# Altium PCB PCB_LC_FILTER.PcbDoc
Units mm, origin at the board's own origin, x right, y up, seen from the top; angles counter-clockwise.
Board outline 152.4 x 101.6 mm, 2 copper layers (Top Layer, Bottom Layer); 15 components, 3 nets, 46 pads, 0 vias.
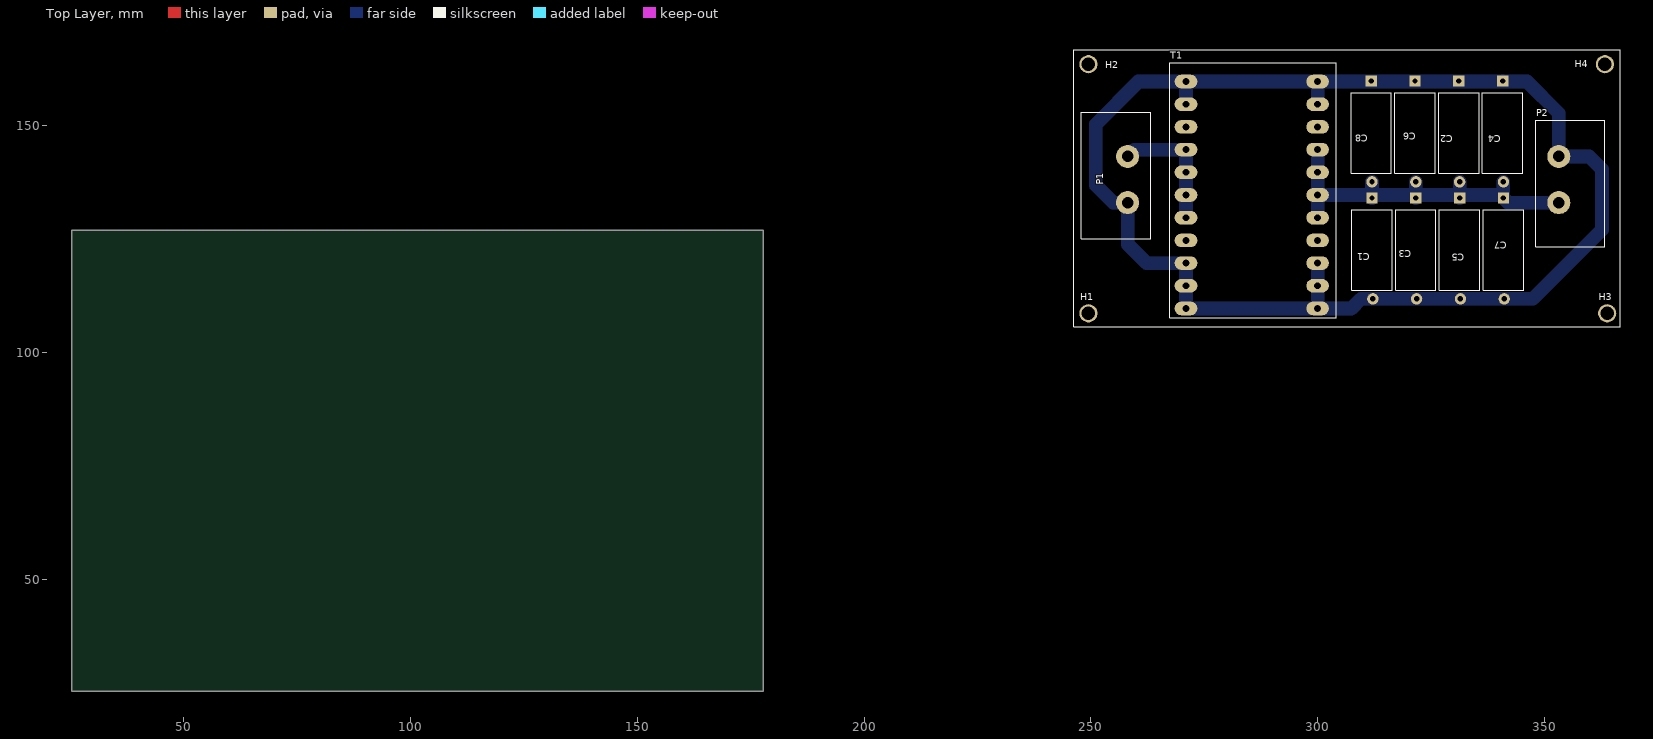
[diagram p0: Top Layer view]
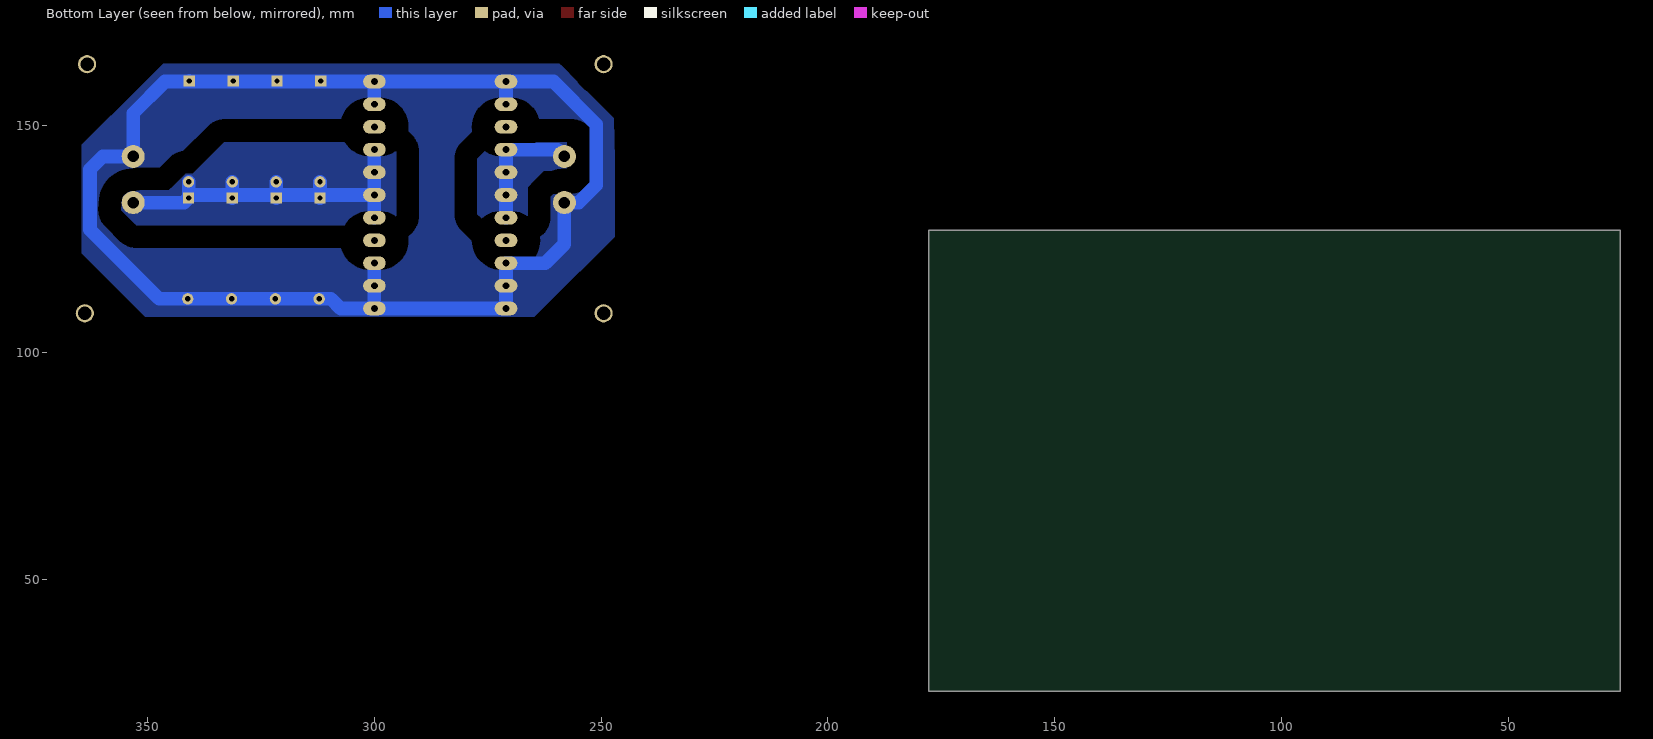
[diagram p1: Bottom Layer view, seen from below]

## Layer stack, top to bottom
Top Layer: signal copper 0.0356
Dielectric: dielectric 0.32, FR-4, Dk 4.8
Bottom Layer: signal copper 0.0356

## Board outline
25.4,25.4 177.8,25.4 177.8,127 25.4,127

## Design rules (kind name [scope] priority, off if disabled: settings)
Clearance 1234 [InNamedPolygon('GND_BOT1') Or  InNamedPolygon('GND_BOT2') Or  InNamedPolygon('GND_BOT3')] p1: gap=5 // 1234
Clearance [All] p2: gap=0.254
PolygonConnect 123 [All vs IsNamedPolygon('GND_BOT1') Or  IsNamedPolygon('GND_BOT2') Or  IsNamedPolygon('GND_BOT3')] p1: connectstyle=Direct reliefconductorwidth=0.254 reliefentries=4 polygonreliefangle="90 Angle" // 123
PolygonConnect [All] p2: connectstyle=Relief reliefconductorwidth=0.254 reliefentries=4 polygonreliefangle="90 Angle"
RoutingVias [All] p1: holewidth=0.711 width=1.27 viastyle="Through Hole" minholewidth=0.711 minwidth=1.27 maxholewidth=0.711 maxwidth=1.27
SilkscreenOverComponentPads [All] p1: minsilkscreentomaskgap=0.254
SolderMaskExpansion [All] p1: expansion=0.102
Width [All] p1: maxlimit=5 minlimit=0.254 preferedwidth=0.254
27 further rules are at their usual default settings.

## Components (designator, comment, footprint, x,y, rotation, side; value= is the part's Value field where it differs from the comment)
C1 "Cap" TU 326.058,123.325 r180 top
C2 "Cap" TU 345.186,149.098 r180 top
C3 "Cap" TU 335.71,123.325 r180 top
C4 "Cap" TU 354.838,149.098 r180 top
C5 "Cap" TU 345.362,123.325 r180 top
C6 "Cap" TU 335.534,149.098 r180 top
C7 "Cap" TU 355.014,123.325 r180 top
C8 "Cap" TU 325.882,149.098 r180 top
H1 "HOLE" HOLE 240.665,101.727 r0 top
H2 "HOLE" HOLE 240.665,156.591 r0 top
H3 "HOLE" HOLE 354.965,101.727 r0 top
H4 "HOLE" HOLE 354.457,156.591 r0 top
P1 "IN" CONNECTOR2 262.382,115.189 r90 top
P2 "OUT" CONNECTOR2 348.742,161.163 r270 top
T1 "transformer" PCBComponent_1 271.272,132.08 r0 top

## Footprints (in the part's own frame and the unit in brackets; to place one, negate y for a bottom-side part, rotate by r counter-clockwise, add the part's x,y. Pads: shape width x height; smd on the part's side, far side on the other; paste and mask are expansions set on the pad)
CONNECTOR2 [mil]
  round 200 hole 100: 1(1105,170) 2(705,170)
  silkscreen extent 390,-30 1490,570
HOLE [mm]
  round 4 hole 3: 1(8.763,6.985)
PCBComponent_1 [mm]
  oval 5x3 hole 1.499: 1(-0.342,27.688) 2(-0.342,22.688) 3(-0.342,17.688) 4(-0.342,12.688) 5(-0.342,7.688) 6(-0.342,2.688) 7(-0.342,-2.312) 8(-0.342,-7.312) 9(-0.342,-12.312) 10(-0.342,-17.312) 11(-0.342,-22.312) 12(28.658,-22.312) 13(28.658,-17.312) 14(28.658,-12.312) 15(28.658,-7.312) 16(28.658,-2.312) 17(28.658,2.688) 18(28.658,7.688) 19(28.658,12.688) 20(28.658,17.688) 21(28.658,22.688) 22(28.658,27.688)
  silkscreen extent -3.91,-24.36 32.75,31.78
TU [mm]
  rect 2.5x2.5 hole 1.2: 1(14.146,-10.787)
  round 2.5 hole 1.2: 2(13.97,11.43)
  silkscreen extent 9.7,-8.25 18.59,9.53

## Part data
C1 C2 C3 C4 C5 C6 C7 C8: "Capacitor"
H1 H2 H3 H4: library part Socket, "Socket"
P1 P2: library part "Header 2", "Header, 2-Pin"
T1: library part "Header 11X2A", "Header, 11-Pin, Dual row"

## Nets (pads, with @x,y where several pads share a name; then routed paths per layer and width w, separated by ;. In a path a pad name is that pad's centre, name@x,y a point inside that pad or via, vN(x,y) a via of type N, cw(c..) or ccw(c..) an arc to the next point about the centre after c; other vN are vias at no path point)
NetC1_1: C1.1 C2.2 C3.1 C4.2 C5.1 C6.2 C7.1 C8.2 P2.1 T1.16 T1.17 T1.18 T1.19 | length 83
  Bottom Layer w3: T1.16 T1.17 ; T1.19 T1.18 T1.17 ; C1.1 C1.1@311.912,134.768 ; C8.2 C1.1@311.912,134.768 ; C3.1 C3.1@321.564,134.768 ; C6.2 C3.1@321.564,134.768 ; C5.1 C5.1@331.216,134.768 ; C2.2 C5.1@331.216,134.768 ; C4.2 C7.1 ; P2.1 341.884,133.096 C7.1 ; T1.17 C1.1@311.912,134.768 ; C1.1@311.912,134.768 C3.1@321.564,134.768 ; C3.1@321.564,134.768 C5.1@331.216,134.768 ; C5.1@331.216,134.768 340.212,134.768 C7.1
NetC1_2: C1.2 C2.1 C3.2 C4.1 C5.2 C6.1 C7.2 C8.1 P1.2 P2.2 T1.1 T1.2 T1.9 T1.10 T1.11 T1.12 T1.13 T1.14 T1.21 T1.22 | length 316.4
  Bottom Layer w3: T1.2 T1.1 ; T1.14@299.93,119.166 T1.13 T1.12 ; T1.21 T1.22 ; T1.1 T1.22 ; T1.1 260.479,159.768 251.079,150.368 251.079,136.906 254.889,133.096 P1.2 258.064,123.952 262.248,119.768 T1.9 T1.10 T1.11 T1.12 ; T1.12 307.38,109.768 309.507,111.895 C1.2 C3.2 C5.2 C7.2 347.353,111.895 362.585,127.127 362.585,140.462 359.791,143.256 P2.2 353.06,152.781 346.073,159.768 340.809,159.768 C4.1 340.575,159.768 331.04,159.768 321.388,159.768 311.736,159.768 T1.22
NetP1_1: P1.1 T1.4 T1.5 T1.6 T1.7 | length 28.5
  Bottom Layer w3: P1.1 259.576,144.768 T1.4 T1.5 T1.6 T1.7
pads on no net: H1.1 H2.1 H3.1 H4.1 T1.3 T1.8 T1.15 T1.20

## Polygon pours and split planes (outlines as drawn)
NetC1_2 on Bottom Layer "GND_BOT1" (solid, remove dead copper, pour order 1002): 247.142,151.511 247.142,151.638 258.699,163.195 259.207,163.703 282.321,163.703 346.456,163.703 351.409,158.75 364.363,145.796 364.363,140.843 364.363,121.92 362.585,120.142 350.393,107.95 334.137,107.95 264.668,107.95 262.509,110.109 247.015,125.603 247.015,142.494
NetC1_1 on Bottom Layer "GND_BOT3" (solid, remove dead copper, pour order 1001): 297.561,146.304 297.053,146.304 295.529,144.78 295.148,144.399 295.148,132.334 295.148,130.048 296.545,128.651 297.053,128.143 300.736,128.143 352.425,128.143 355.473,131.191 355.727,131.445 355.727,133.985 355.727,135.001 355.219,135.509 354.965,135.763 352.044,135.763 345.186,135.763 344.17,136.779 341.503,139.446 339.979,139.446 332.994,146.431 300.101,146.431
NetP1_1 on Bottom Layer "GND_BOT2" (solid, remove dead copper, pour order 1000): 268.097,128.143 268.224,128.016 273.939,128.016 274.701,128.016 277.241,130.556 277.241,142.113 277.241,142.748 273.939,146.05 273.558,146.431 256.54,146.431 256.413,146.431 255.27,145.288 255.27,141.351 255.397,141.351 256.159,140.589 256.667,140.081 261.874,140.081 262.636,140.081 264.668,138.049 266.192,136.525 266.192,129.794

## Silkscreen, mask and mechanical layers (free items; w line width, h text height)
Top Overlay:
  lines w0.254: 246.253,105.791 246.253,166.814 366.649,166.814 366.649,105.791 246.253,105.791

## Dimensions
246.253,105.791 to 366.649,105.791 on Top Overlay
366.649,166.814 to 366.649,105.791 on Top Overlay